# Altium PCB uC_interface_pcb.PcbDoc
Units mil, origin at the board's own origin, x right, y up, seen from the top; angles counter-clockwise.
Board outline 12000 x 9000 mil, 2 copper layers (Top Layer, Bottom Layer); 208 components, 120 nets, 611 pads, 0 vias.
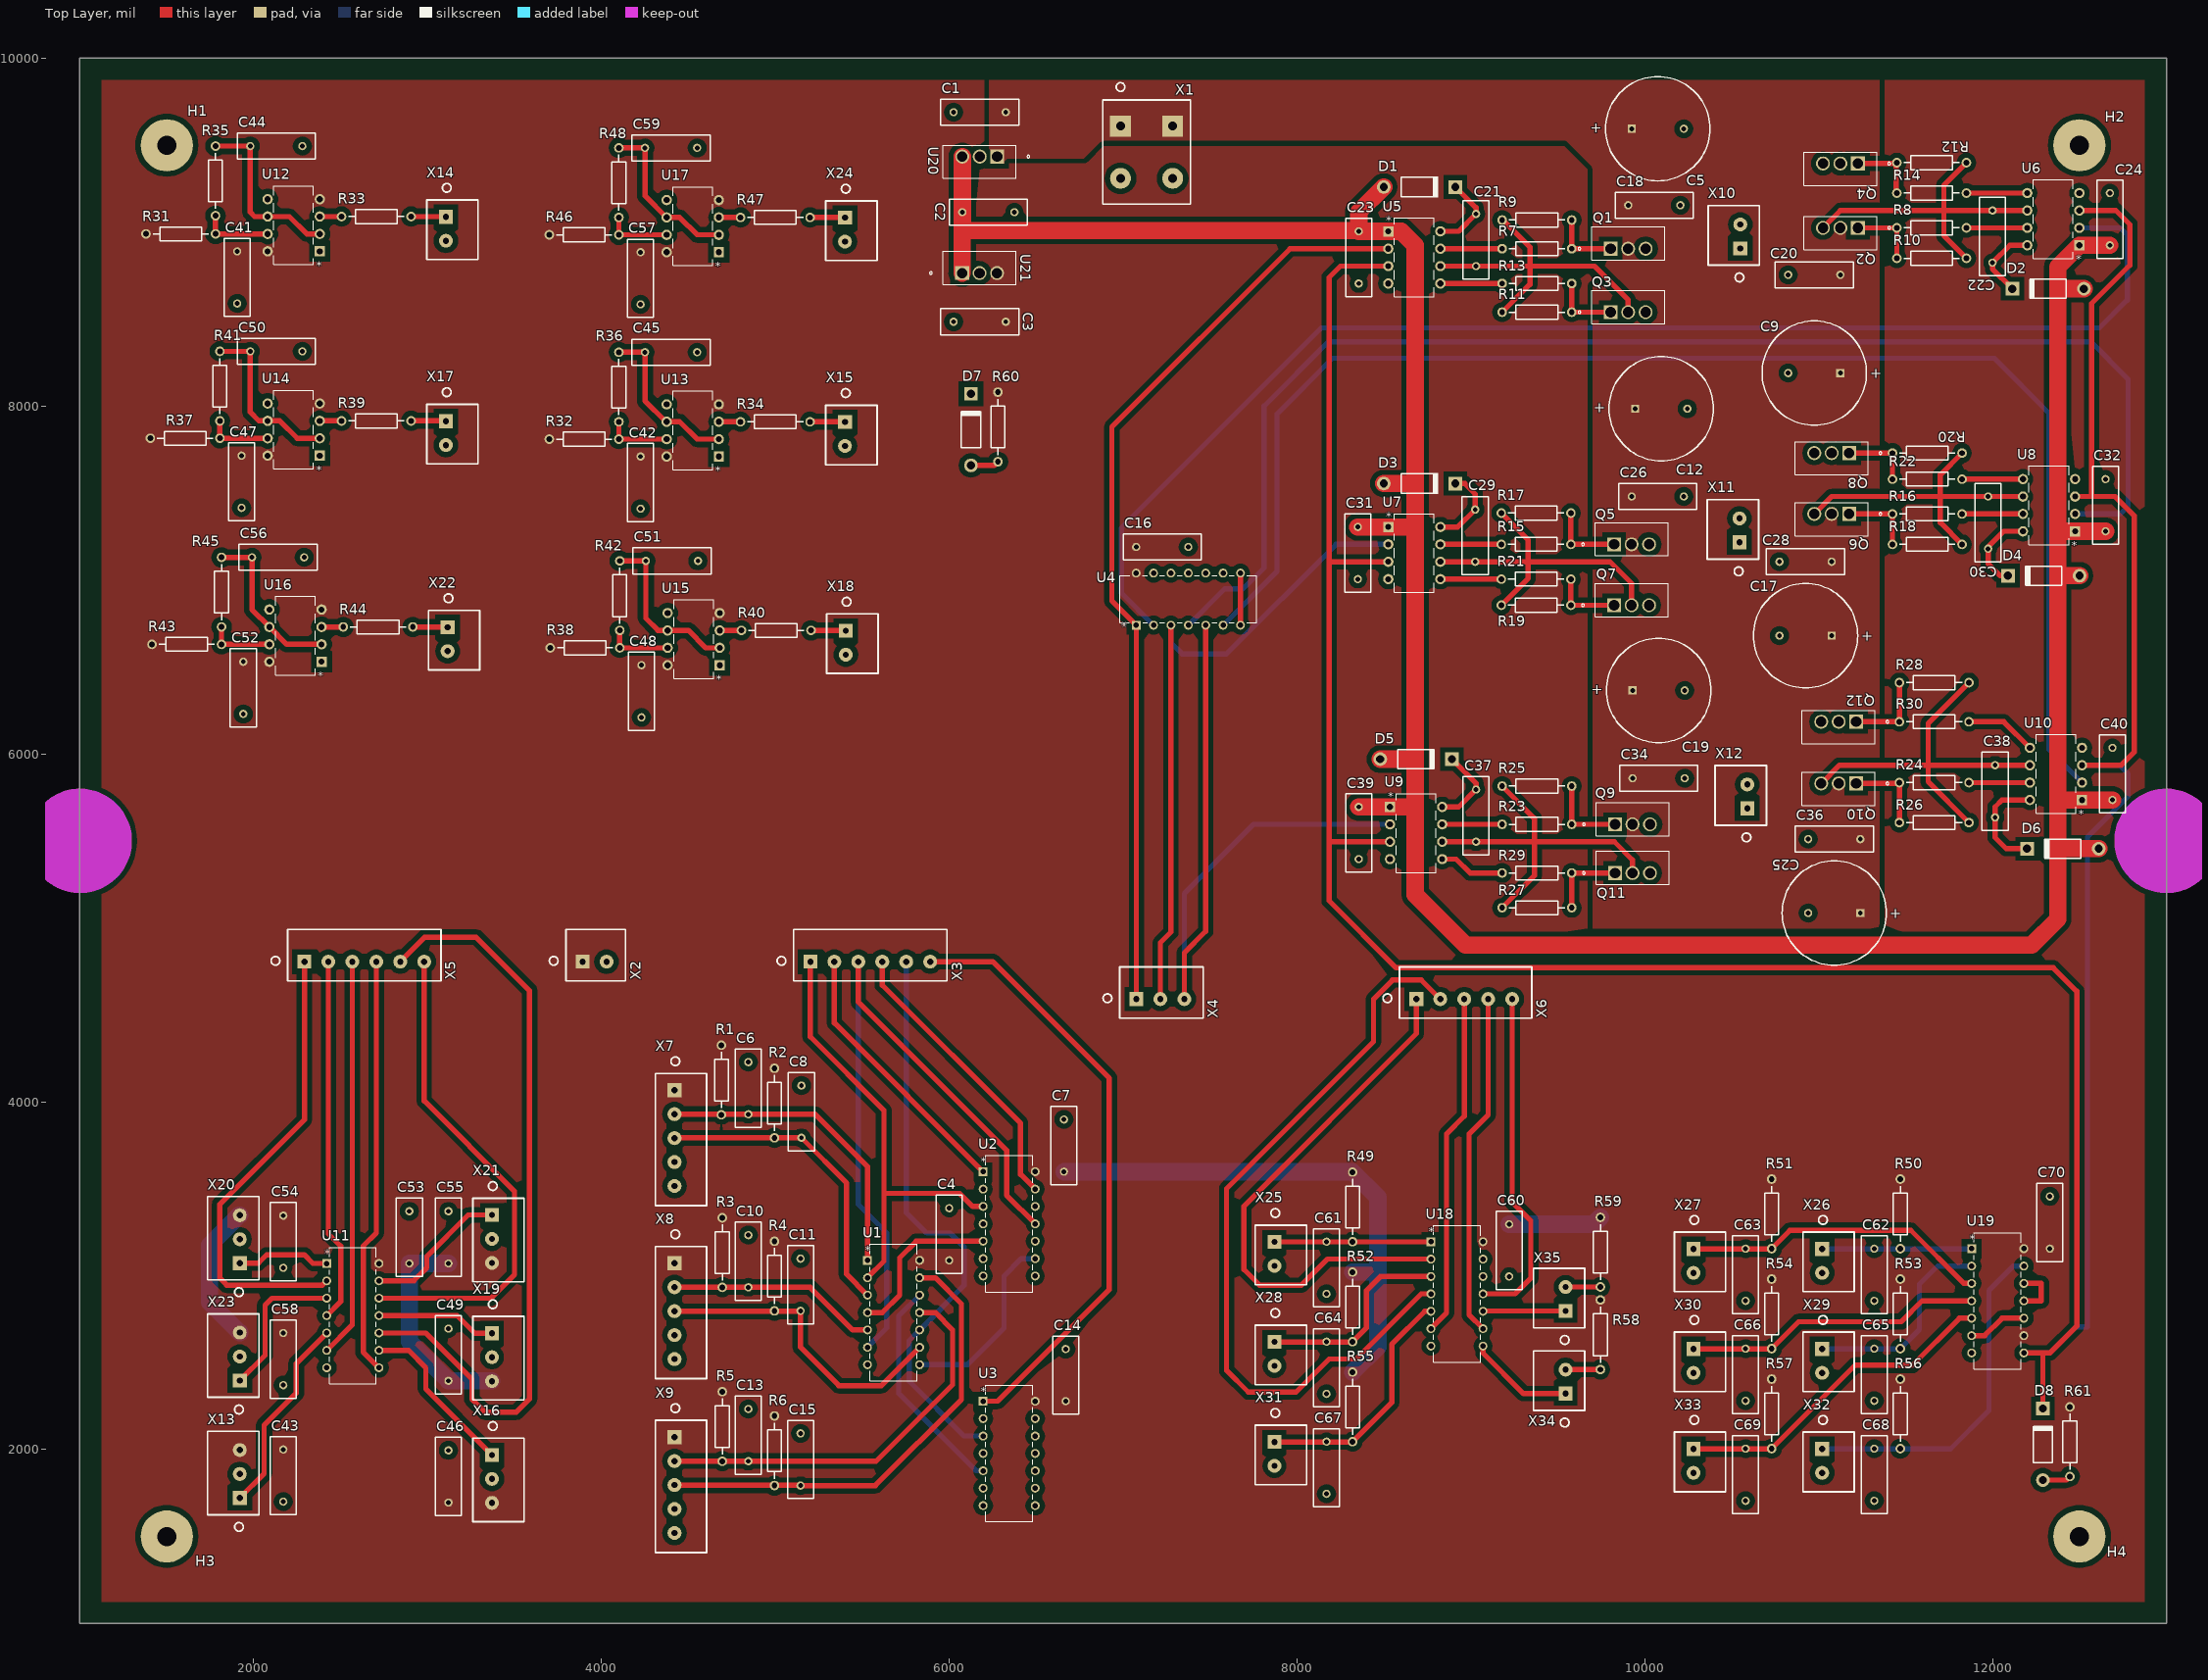
[diagram p0: Top Layer view]
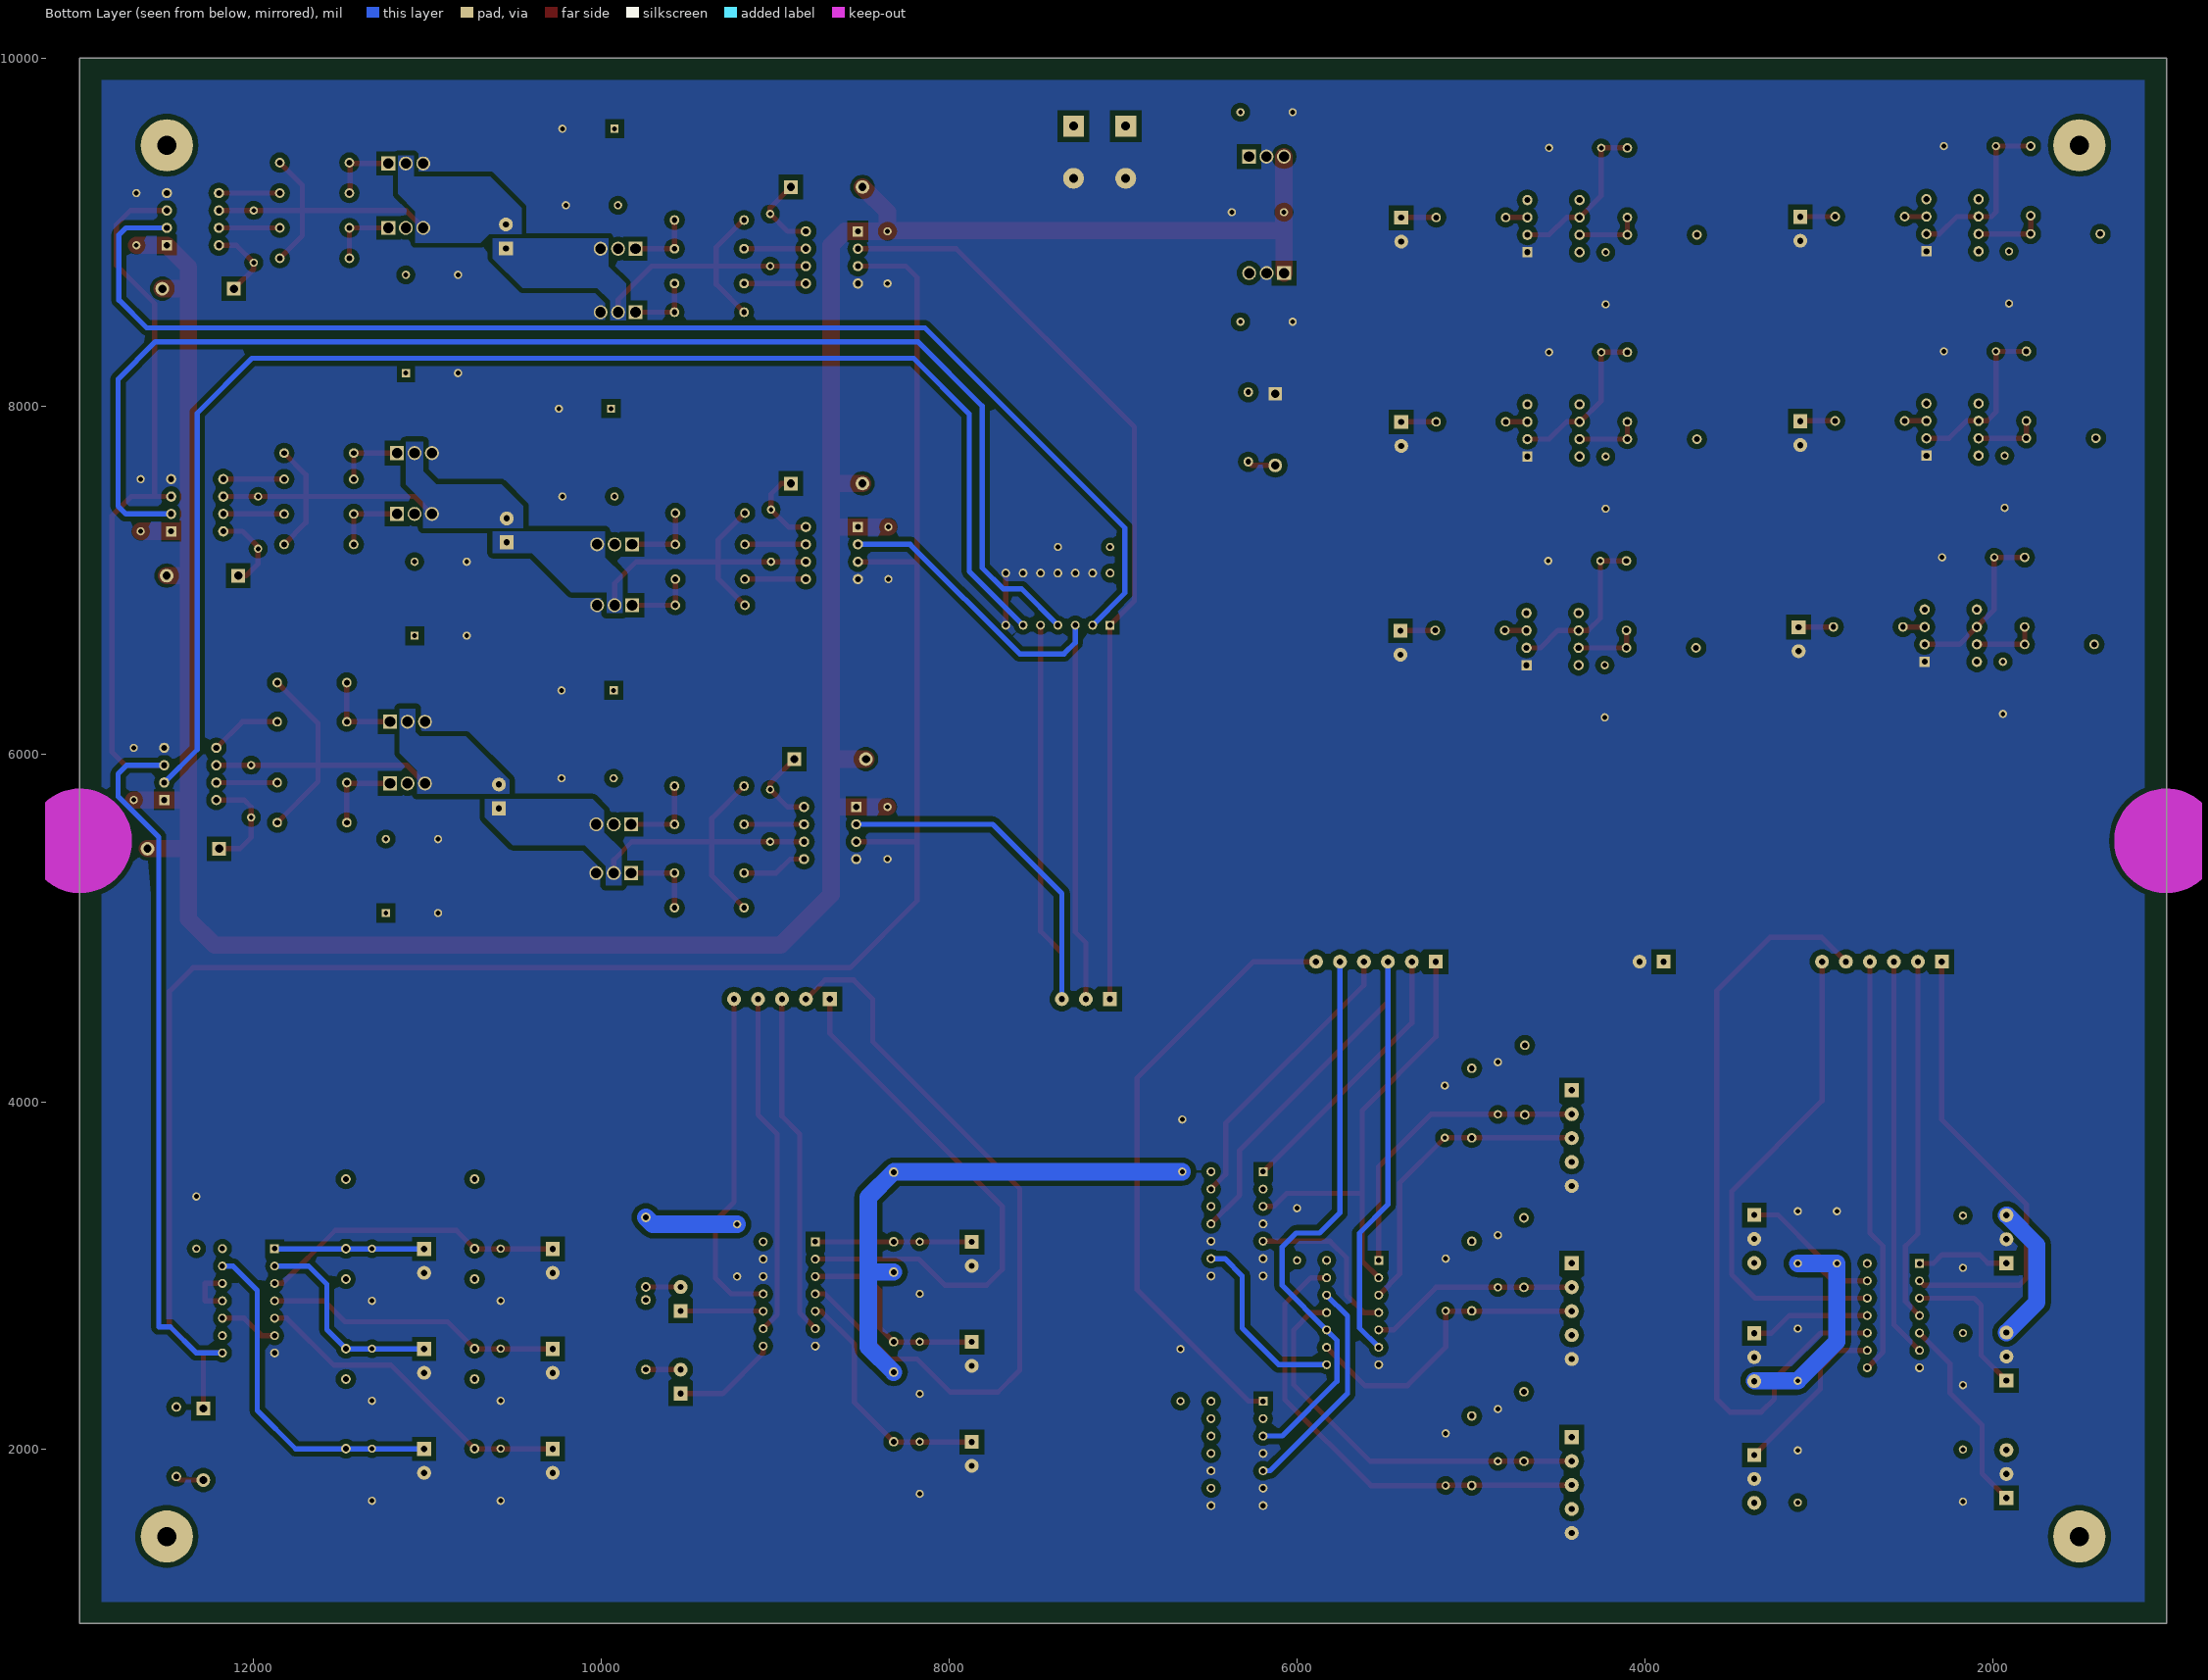
[diagram p1: Bottom Layer view, seen from below]

## Layer stack, top to bottom
Top Layer: signal copper 1.4
Dielectric: dielectric 12.6, FR-4, Dk 4.8
Bottom Layer: signal copper 1.4

## Board outline
1000,1000 13000,1000 13000,10000 1000,10000

## Design rules (kind name [scope] priority, off if disabled: settings)
Clearance Clearance_3 [InNamedPolygon('Bot-GND')] p1: gap=30
Clearance Clearance_2 [InNamedPolygon('Top-V5V')] p2: gap=30
Clearance Clearance_1 [InNamedPolygon('Top-V24V')] p3: gap=30
Clearance [All] p4: gap=10
Height [All] p1: minheight=0 maxheight=2000 prefheight=500
HoleSize [All] p1: absolutevalues=TRUE maxlimit=150 minlimit=1 maxpercent=80.000 minpercent=20.000
PolygonConnect [All] p1: connectstyle=Direct reliefconductorwidth=10 reliefentries=4 polygonreliefangle="90 Angle" airgapwidth=10
RoutingVias [All] p1: holewidth=28 width=50 viastyle="Through Hole" minholewidth=28 minwidth=50 maxholewidth=28 maxwidth=50
SilkToSilkClearance [All] p1 off: silktosilkclearance=10
SilkscreenOverComponentPads [All] p1 off: minsilkscreentomaskgap=10
SolderMaskExpansion [All] p1: expansion=4
Width [All] p1: maxlimit=100 minlimit=30 preferedwidth=30
24 further rules are at their usual default settings.

## Classes and differential pairs
component class 1_Top_Sheet: C1 C2 C3 D7 H1 H2 H3 H4 R60 U20 U21 X1 X2 X3 X4 X5 X6
component class S2: C4 C6 C7 C8 C10 C11 C13 C14 C15 R1 R2 R3 R4 R5 R6 U1 U2 U3 X7 X8 X9
component class S3a: C5 C9 C12 C16 C17 C18 C20 C21 C22 C23 C24 C26 C28 C29 C30 C31 C32 D1 D2 D3 D4 Q1 Q2 Q3 Q4 Q5 Q6 Q7 Q8 R7 R8 R9 R10 R11 R12 R13 R14 R15 R16 R17 R18 R19 R20 R21 R22 U4 U5 U6 U7 U8 X10 X11
component class S3b: C19 C25 C34 C36 C37 C38 C39 C40 D5 D6 Q9 Q10 Q11 Q12 R23 R24 R25 R26 R27 R28 R29 R30 U9 U10 X12
component class S4: C41 C42 C43 C44 C45 C46 C47 C48 C49 C50 C51 C52 C53 C54 C55 C56 C57 C58 C59 R31 R32 R33 R34 R35 R36 R37 R38 R39 R40 R41 R42 R43 R44 R45 R46 R47 R48 U11 U12 U13 U14 U15 U16 U17 X13 X14 X15 X16 X17 X18 X19 X20 X21 X22 X23 X24
component class S5: C60 C61 C62 C63 C64 C65 C66 C67 C68 C69 C70 D8 R49 R50 R51 R52 R53 R54 R55 R56 R57 R58 R59 R61 U18 U19 X25 X26 X27 X28 X29 X30 X31 X32 X33 X34 X35

## Components (designator, comment, footprint, x,y, rotation, side; value= is the part's Value field where it differs from the comment)
C1 "Cap" RAD-0.3 6175,9690 r0 top
C2 "Cap" RAD-0.3 6225,9115 r180 top
C3 "Cap" RAD-0.3 6175,8485 r0 top
C4 "Cap" RAD-0.3 5999.76,3237.64 r270 top
C5 "Cap Pol1" RB7.6-15 10075,9595 r180 top
C6 "Cap" RAD-0.3 4844.76,4077.64 r270 top
C7 "Cap" RAD-0.3 6659.76,3747.64 r270 top
C8 "Cap" RAD-0.3 5149.76,3942.64 r270 top
C9 "Cap Pol1" RB7.6-15 10975,8190 r0 top
C10 "Cap" RAD-0.3 4844.76,3082.64 r270 top
C11 "Cap" RAD-0.3 5144.76,2947.64 r270 top
C12 "Cap Pol1" RB7.6-15 10095,7985 r180 top
C13 "Cap" RAD-0.3 4844.76,2082.64 r270 top
C14 "Cap" RAD-0.3 6669.76,2427.64 r270 top
C15 "Cap" RAD-0.3 5144.76,1942.64 r270 top
C16 "Cap" RAD-0.3 7225,7190 r180 top
C17 "Cap Pol1" RB7.6-15 10925,6680 r0 top
C18 "Cap" RAD-0.3 10055,9155 r180 top
C19 "Cap Pol1" RB7.6-15 10080,6365 r180 top
C20 "Cap" RAD-0.3 10975,8755 r0 top
C21 "Cap" RAD-0.3 9030,8955 r90 top
C22 "Cap" RAD-0.3 12000,8975 r270 top
C23 "Cap" RAD-0.3 8355,8855 r90 top
C24 "Cap" RAD-0.3 12675,9075 r270 top
C25 "Cap Pol1" RB7.6-15 11090,5085 r0 top
C26 "Cap" RAD-0.3 10075,7480 r180 top
C28 "Cap" RAD-0.3 10925,7105 r0 top
C29 "Cap" RAD-0.3 9025,7255 r90 top
C30 "Cap" RAD-0.3 11975,7330 r270 top
C31 "Cap" RAD-0.3 8350,7155 r90 top
C32 "Cap" RAD-0.3 12650,7430 r270 top
C34 "Cap" RAD-0.3 10080,5860 r180 top
C36 "Cap" RAD-0.3 11090,5510 r0 top
C37 "Cap" RAD-0.3 9030,5645 r90 top
C38 "Cap" RAD-0.3 12015,5785 r270 top
C39 "Cap" RAD-0.3 8355,5545 r90 top
C40 "Cap" RAD-0.3 12690,5885 r270 top
C41 "Cap" RAD-0.3 1905,8740 r90 top
C42 "Cap" RAD-0.3 4225,7560 r90 top
C43 "Cap" RAD-0.3 2170,1850 r90 top
C44 "Cap" RAD-0.3 2130,9495 r180 top
C45 "Cap" RAD-0.3 4400,8310 r180 top
C46 "Cap" RAD-0.3 3120,1845 r270 top
C47 "Cap" RAD-0.3 1930,7565 r90 top
C48 "Cap" RAD-0.3 4230,6360 r90 top
C49 "Cap" RAD-0.3 3120,2545 r270 top
C50 "Cap" RAD-0.3 2130,8315 r180 top
C51 "Cap" RAD-0.3 4405,7110 r180 top
C52 "Cap" RAD-0.3 1940,6380 r90 top
C53 "Cap" RAD-0.3 2895,3220 r270 top
C54 "Cap" RAD-0.3 2170,3195 r90 top
C55 "Cap" RAD-0.3 3120,3220 r270 top
C56 "Cap" RAD-0.3 2140,7130 r180 top
C57 "Cap" RAD-0.3 4225,8735 r90 top
C58 "Cap" RAD-0.3 2170,2520 r90 top
C59 "Cap" RAD-0.3 4400,9485 r180 top
C60 "Cap" RAD-0.3 9220,3145 r90 top
C61 "Cap" RAD-0.3 8170,3045 r90 top
C62 "Cap" RAD-0.3 11320,3005 r90 top
C63 "Cap" RAD-0.3 10580,3005 r90 top
C64 "Cap" RAD-0.3 8170,2470 r90 top
C65 "Cap" RAD-0.3 11320,2430 r90 top
C66 "Cap" RAD-0.3 10580,2430 r90 top
C67 "Cap" RAD-0.3 8170,1895 r90 top
C68 "Cap" RAD-0.3 11320,1855 r90 top
C69 "Cap" RAD-0.3 10580,1855 r90 top
C70 "Cap" RAD-0.3 12330,3305 r270 top
D1 "Diode 1N4001" DO-41 8705,9260 r0 top
D2 "Diode 1N4001" DO-41 12320,8675 r180 top
D3 "Diode 1N4001" DO-41 8705,7555 r0 top
D4 "Diode 1N4001" DO-41 12295,7025 r180 top
D5 "Diode 1N4001" DO-41 8685,5970 r0 top
D6 "Diode 1N4001" DO-41 12405,5455 r180 top
D7 "Diode 1N4001" DO-41 6125,7865 r90 top
D8 "Diode 1N4001" DO-41 12290,2030 r90 top
H1 "6-32\" Standoff" "6-32\" Standoff"#1 1200,9800 r0 top
H2 "6-32\" Standoff" "6-32\" Standoff"#2 12800,9800 r0 top
H3 "6-32\" Standoff" "6-32\" Standoff"#3 1200,1200 r0 top
H4 "6-32\" Standoff" "6-32\" Standoff"#4 12800,1200 r0 top
Q1 "STP100N6F7" TO-220 10010,8970 r0 top
Q2 "STP100N6F7" TO-220 11020,8960 r180 top
Q3 "STP100N6F7" TO-220 10010,8605 r0 top
Q4 "STP100N6F7" TO-220 11020,9330 r180 top
Q5 "STP100N6F7" TO-220 10030,7270 r0 top
Q6 "STP100N6F7" TO-220 10970,7315 r180 top
Q7 "STP100N6F7" TO-220 10030,6920 r0 top
Q8 "STP100N6F7" TO-220 10970,7665 r180 top
Q9 "STP100N6F7" TO-220 10035,5660 r0 top
Q10 "STP100N6F7" TO-220 11010,5765 r180 top
Q11 "STP100N6F7" TO-220 10035,5380 r0 top
Q12 "STP100N6F7" TO-220 11010,6120 r180 top
R1 "Res2" AXIAL-0.4 4689.76,4125 r90 top
R2 "Res2" AXIAL-0.4 4994.76,3992.64 r90 top
R3 "Res2" AXIAL-0.4 4694.76,3132.64 r90 top
R4 "Res2" AXIAL-0.4 4994.76,2997.64 r90 top
R5 "Res2" AXIAL-0.4 4694.76,2132.64 r90 top
R6 "Res2" AXIAL-0.4 4994.76,1992.64 r90 top
R7 "Res2" AXIAL-0.4 9380,8905 r180 top
R8 "Res2" AXIAL-0.4 11650,9025 r0 top
R9 "Res2" AXIAL-0.4 9380,9070 r180 top
R10 "Res2" AXIAL-0.4 11650,8850 r0 top
R11 "Res2" AXIAL-0.4 9380,8540 r0 top
R12 "Res2" AXIAL-0.4 11650,9400 r180 top
R13 "Res2" AXIAL-0.4 9380,8705 r180 top
R14 "Res2" AXIAL-0.4 11650,9225 r0 top
R15 "Res2" AXIAL-0.4 9375,7205 r180 top
R16 "Res2" AXIAL-0.4 11625,7380 r0 top
R17 "Res2" AXIAL-0.4 9375,7385 r180 top
R18 "Res2" AXIAL-0.4 11625,7205 r0 top
R19 "Res2" AXIAL-0.4 9375,6855 r0 top
R20 "Res2" AXIAL-0.4 11625,7730 r180 top
R21 "Res2" AXIAL-0.4 9375,7005 r180 top
R22 "Res2" AXIAL-0.4 11625,7580 r0 top
R23 "Res2" AXIAL-0.4 9380,5595 r180 top
R24 "Res2" AXIAL-0.4 11665,5835 r0 top
R25 "Res2" AXIAL-0.4 9380,5815 r180 top
R26 "Res2" AXIAL-0.4 11665,5605 r0 top
R27 "Res2" AXIAL-0.4 9380,5115 r0 top
R28 "Res2" AXIAL-0.4 11665,6410 r180 top
R29 "Res2" AXIAL-0.4 9380,5315 r180 top
R30 "Res2" AXIAL-0.4 11665,6185 r0 top
R31 "Res2" AXIAL-0.4 1580,8990 r0 top
R32 "Res2" AXIAL-0.4 3900,7810 r0 top
R33 "Res2" AXIAL-0.4 2705,9090 r180 top
R34 "Res2" AXIAL-0.4 5000,7910 r180 top
R35 "Res2" AXIAL-0.4 1780,9295 r90 top
R36 "Res2" AXIAL-0.4 4100,8110 r90 top
R37 "Res2" AXIAL-0.4 1605,7815 r0 top
R38 "Res2" AXIAL-0.4 3905,6610 r0 top
R39 "Res2" AXIAL-0.4 2705,7915 r180 top
R40 "Res2" AXIAL-0.4 5005,6710 r180 top
R41 "Res2" AXIAL-0.4 1805,8115 r90 top
R42 "Res2" AXIAL-0.4 4105,6910 r90 top
R43 "Res2" AXIAL-0.4 1615,6630 r0 top
R44 "Res2" AXIAL-0.4 2715,6730 r180 top
R45 "Res2" AXIAL-0.4 1815,6930 r90 top
R46 "Res2" AXIAL-0.4 3900,8985 r0 top
R47 "Res2" AXIAL-0.4 5000,9085 r180 top
R48 "Res2" AXIAL-0.4 4100,9285 r90 top
R49 "Res2" AXIAL-0.4 8320,3395 r90 top
R50 "Res2" AXIAL-0.4 11470,3355 r90 top
R51 "Res2" AXIAL-0.4 10730,3355 r90 top
R52 "Res2" AXIAL-0.4 8320,2820 r90 top
R53 "Res2" AXIAL-0.4 11470,2780 r90 top
R54 "Res2" AXIAL-0.4 10730,2780 r90 top
R55 "Res2" AXIAL-0.4 8320,2245 r90 top
R56 "Res2" AXIAL-0.4 11470,2205 r90 top
R57 "Res2" AXIAL-0.4 10730,2205 r90 top
R58 "Res2" AXIAL-0.4 9745,2660 r90 top
R59 "Res2" AXIAL-0.4 9745,3135 r90 top
R60 "Res2" AXIAL-0.4 6280,7880 r90 top
R61 "Res2" AXIAL-0.4 12445,2045 r90 top
U1 "IC HEX SCHMITT-TRIG INV 14-DIP" 14-DIP 5829.76,2487.64 r0 top
U2 "IC D-TYPE POS TRG DUAL 14DIP" 14-DIP 6494.76,2997.64 r0 top
U3 "IC D-TYPE POS TRG DUAL 14DIP" 14-DIP 6494.76,1677.64 r0 top
U4 "IC HEX SCHMITT-TRIG INV 14-DIP" 14-DIP 7675,7040 r90 top
U5 "IC DRIVER HALF BRIDGE 8DIP" 8-DIP 8825,8705 r0 top
U6 "IC DRIVER HALF BRIDGE 8DIP" 8-DIP 12200,9225 r180 top
U7 "IC DRIVER HALF BRIDGE 8DIP" 8-DIP 8825,7005 r0 top
U8 "IC DRIVER HALF BRIDGE 8DIP" 8-DIP 12175,7580 r180 top
U9 "IC DRIVER HALF BRIDGE 8DIP" 8-DIP 8835,5395 r0 top
U10 "IC DRIVER HALF BRIDGE 8DIP" 8-DIP 12215,6035 r180 top
U11 "IC HEX SCHMITT-TRIG INV 14-DIP" 14-DIP 2720,2470 r0 top
U12 "IC OSC SINGLE TIMER 100KHZ 8-DIP" 8-DIP 2080,9190 r180 top
U13 "IC OSC SINGLE TIMER 100KHZ 8-DIP" 8-DIP 4375,8010 r180 top
U14 "IC OSC SINGLE TIMER 100KHZ 8-DIP" 8-DIP 2080,8015 r180 top
U15 "IC OSC SINGLE TIMER 100KHZ 8-DIP" 8-DIP 4380,6810 r180 top
U16 "IC OSC SINGLE TIMER 100KHZ 8-DIP" 8-DIP 2090,6830 r180 top
U17 "IC OSC SINGLE TIMER 100KHZ 8-DIP" 8-DIP 4375,9185 r180 top
U18 "IC HEX SCHMITT-TRIG INV 14-DIP" 14-DIP 9070,2595 r0 top
U19 "IC GATE AND 3CH 3-INP 14DIP" 14-DIP 12180,2555 r0 top
U20 "IC REG LINEAR 15V 1A TO220-3" TO-220 6070,9370 r180 top
U21 "IC REG LINEAR 5V 1.5A TO220-3" TO-220 6280,8830 r0 top
X1 "TERM BLOCK HDR 2POS VERT 7.62MM" "PCV 4-2" 6985,9610 r270 top
X2 "TERM BLOCK HDR 2POS VERT 3.5MM" "WR-TBL-3211 2" 3795,4695 r0 top
X3 "TERM BLOCK HDR 6POS VERT 3.5MM" "WR-TBL-3211 6" 5105,4695 r0 top
X4 "TERM BLOCK HDR 3POS VERT 3.5MM" "WR-TBL-3211 3" 6980,4480 r0 top
X5 "TERM BLOCK HDR 6POS VERT 3.5MM" "WR-TBL-3211 6" 2195,4695 r0 top
X6 "TERM BLOCK HDR 5POS VERT 3.5MM" "WR-TBL-3211 5" 8590,4480 r0 top
X7 "TERM BLOCK HDR 5POS VERT 3.5MM" "WR-TBL-3211 5" 4309.76,4162.64 r270 top
X8 "TERM BLOCK HDR 5POS VERT 3.5MM" "WR-TBL-3211 5" 4309.76,3167.64 r270 top
X9 "TERM BLOCK HDR 5POS VERT 3.5MM" "WR-TBL-3211 5" 4309.76,2167.64 r270 top
X10 "TERM BLOCK HDR 2POS VERT 3.5MM" "WR-TBL-3211 2" 10660,8810 r90 top
X11 "TERM BLOCK HDR 2POS VERT 3.5MM" "WR-TBL-3211 2" 10655,7120 r90 top
X12 "TERM BLOCK HDR 2POS VERT 3.5MM" "WR-TBL-3211 2" 10700,5590 r90 top
X13 "TERM BLOCK HDR 3POS VERT 3.5MM" "WR-TBL-3211 3" 2030,1625 r90 top
X14 "TERM BLOCK HDR 2POS VERT 3.5MM" "WR-TBL-3211 2" 2995,9185 r270 top
X15 "TERM BLOCK HDR 2POS VERT 3.5MM" "WR-TBL-3211 2" 5290,8005 r270 top
X16 "TERM BLOCK HDR 3POS VERT 3.5MM" "WR-TBL-3211 3" 3260,2065 r270 top
X17 "TERM BLOCK HDR 2POS VERT 3.5MM" "WR-TBL-3211 2" 2995,8010 r270 top
X18 "TERM BLOCK HDR 2POS VERT 3.5MM" "WR-TBL-3211 2" 5295,6805 r270 top
X19 "TERM BLOCK HDR 3POS VERT 3.5MM" "WR-TBL-3211 3" 3260,2765 r270 top
X20 "TERM BLOCK HDR 3POS VERT 3.5MM" "WR-TBL-3211 3" 2030,2975 r90 top
X21 "TERM BLOCK HDR 3POS VERT 3.5MM" "WR-TBL-3211 3" 3260,3445 r270 top
X22 "TERM BLOCK HDR 2POS VERT 3.5MM" "WR-TBL-3211 2" 3005,6825 r270 top
X23 "TERM BLOCK HDR 3POS VERT 3.5MM" "WR-TBL-3211 3" 2030,2300 r90 top
X24 "TERM BLOCK HDR 2POS VERT 3.5MM" "WR-TBL-3211 2" 5290,9180 r270 top
X25 "TERM BLOCK HDR 2POS VERT 3.5MM" "WR-TBL-3211 2" 7760,3290 r270 top
X26 "TERM BLOCK HDR 2POS VERT 3.5MM" "WR-TBL-3211 2" 10910,3250 r270 top
X27 "TERM BLOCK HDR 2POS VERT 3.5MM" "WR-TBL-3211 2" 10170,3250 r270 top
X28 "TERM BLOCK HDR 2POS VERT 3.5MM" "WR-TBL-3211 2" 7760,2715 r270 top
X29 "TERM BLOCK HDR 2POS VERT 3.5MM" "WR-TBL-3211 2" 10910,2675 r270 top
X30 "TERM BLOCK HDR 2POS VERT 3.5MM" "WR-TBL-3211 2" 10170,2675 r270 top
X31 "TERM BLOCK HDR 2POS VERT 3.5MM" "WR-TBL-3211 2" 7760,2140 r270 top
X32 "TERM BLOCK HDR 2POS VERT 3.5MM" "WR-TBL-3211 2" 10910,2100 r270 top
X33 "TERM BLOCK HDR 2POS VERT 3.5MM" "WR-TBL-3211 2" 10170,2100 r270 top
X34 "TERM BLOCK HDR 2POS VERT 3.5MM" "WR-TBL-3211 2" 9655,2225 r90 top
X35 "TERM BLOCK HDR 2POS VERT 3.5MM" "WR-TBL-3211 2" 9655,2700 r90 top

## Footprints (in the part's own frame and the unit in brackets; to place one, negate y for a bottom-side part, rotate by r counter-clockwise, add the part's x,y. Pads: shape width x height; smd on the part's side, far side on the other; paste and mask are expansions set on the pad)
"6-32\" Standoff"#1 [mil] "Hole for a 6-32\" Standoff"
  round 300 hole 109.38: 0(300,-300)
"6-32\" Standoff"#2 [mil] "Hole for a 6-32\" Standoff"
  round 300 hole 109.38: 0(-300,-300)
"6-32\" Standoff"#3 [mil] "Hole for a 6-32\" Standoff"
  round 300 hole 109.38: 0(300,300)
"6-32\" Standoff"#4 [mil] "Hole for a 6-32\" Standoff"
  round 300 hole 109.38: 0(-300,300)
8-DIP [mil]
  rect 59x59 / inner round 60 / far side rect 59x59 hole 35 paste+0 mask+0: 1(-300,300)
  round 59 / inner round 60 / far side round 59 hole 35 paste+0 mask+0: 2(-300,200) 3(-300,100) 4(-300,0) 5(0,0) 6(0,100) 7(0,200) 8(0,300)
  silkscreen extent -264,-76 -36,376, body extent 0,0 10,10, height 10
14-DIP [mil]
  rect 51x51 / inner round 60 / far side rect 51x51 hole 31 paste+0 mask+0: 1(-300,600)
  round 51 / inner round 60 / far side round 51 hole 31 paste+0 mask+0: 2(-300,500) 3(-300,400) 4(-300,300) 5(-300,200) 6(-300,100) 7(-300,0) 8(0,0) 9(0,100) 10(0,200) 11(0,300) 12(0,400) 13(0,500) 14(0,600)
  silkscreen extent -285,-92 -15,692, body extent 0,0 10,10, height 10
AXIAL-0.4 [mm] "Axial Device, Thru-Hole; 2 Leads; 0.4 in Pin Spacing"
  round 1.4 hole 0.85: 1(-5.08,0) 2(5.08,0)
  silkscreen extent -4.06,-1.02 4.06,1.02
DO-41 [mm] "Diode, Axial; Body 5.2 x 2.7 mm (LxDia. max), Lead Dia. 0.86 mm (max)"
  round 2 hole 1.2: 1(-5.23,0)
  rect 2x2 hole 1.2: 2(5.23,0)
  silkscreen extent -2.65,-1.4 2.75,1.4
"PCV 4-2" [mil] "TERM BLOCK HDR 2POS VERT 7.62MM"
  rect 120x120 hole 51.18: 1(0,300) 1(0,0)
  round 120 hole 51.18: 2(300,300) 2(300,0)
  silkscreen extent -250,-102 449,402
RAD-0.3 [mm] "Radial Cap, Thru-Hole; 2 Leads; 0.3 in Pin Spacing"
  round 1.2 hole 0.7: 1(-3.81,0) 2(3.81,0)
  silkscreen extent -5.71,-1.91 5.71,1.91
RB7.6-15 [mm] "Polarized Capacitor (Radial); 2 Leads"
  rect 1.2x1.2 hole 0.7: 1(3.81,0)
  round 1.2 hole 0.7: 2(-3.81,0)
  silkscreen extent -7.62,-7.62 7.62,7.62
TO-220 [mil]
  rect 80x80 / inner round 60 / far side rect 80x80 hole 60: 1(-205.79,-65)
  round 80 / inner round 60 / far side round 80 hole 60: 2(-105.39,-65) 3(-5,-65)
  silkscreen extent -393,-130 105,60, body extent -5,-5 5,5, height 10
"WR-TBL-3211 2" [mm] "TERM BLOCK HDR 2POS VERT 3.5MM"
  rect 2.032x2.032 hole 0.9: 1(2.45,2.8)
  round 2.032 hole 0.9: 2(5.95,2.8)
  silkscreen extent -2.41,0 8.7,7.5
"WR-TBL-3211 3" [mm] "TERM BLOCK HDR 3POS VERT 3.5MM"
  rect 2.032x2.032 hole 0.9: 1(2.45,2.8)
  round 2.032 hole 0.9: 2(5.95,2.8) 3(9.45,2.8)
  silkscreen extent -2.41,0 12.2,7.5
"WR-TBL-3211 5" [mm] "TERM BLOCK HDR 5POS VERT 3.5MM"
  rect 2.032x2.032 hole 0.9: 1(2.45,2.8)
  round 2.032 hole 0.9: 2(5.95,2.8) 3(9.45,2.8) 4(12.95,2.8) 5(16.45,2.8)
  silkscreen extent -2.41,0 19.3,7.5
"WR-TBL-3211 6" [mm] "TERM BLOCK HDR 6POS VERT 3.5MM"
  rect 2.032x2.032 hole 0.9: 1(2.45,2.8)
  round 2.032 hole 0.9: 2(5.95,2.8) 3(9.45,2.8) 4(12.95,2.8) 5(16.45,2.8) 6(19.95,2.8)
  silkscreen extent -2.41,0 22.4,7.5

## Part data
C1 C2 C3 C4 C6 C7 C8 C10 C11 C13 C14 C15 C16 C18 C20 C21 C22 C23 C24 C26 C28 C29 C30 C31 C32 C34 C36 C37 C38 C39 C40 C41 C42 C43 C44 C45 C46 C47 C48 C49 C50 C51 C52 C53 C54 C55 C56 C57 C58 C59 C60 C61 C62 C63 C64 C65 C66 C67 C68 C69 C70: "Capacitor"
C5 C9 C12 C17 C19 C25: "Polarized Capacitor (Radial)"
D1 D2 D3 D4 D5 D6 D7 D8: "1 Amp General Purpose Rectifier"
H1 H2 H3 H4: "Mounting hole for 6-32\" Standoff"
R1 R2 R3 R4 R5 R6 R7 R8 R9 R10 R11 R12 R13 R14 R15 R16 R17 R18 R19 R20 R21 R22 R23 R24 R25 R26 R27 R28 R29 R30 R31 R32 R33 R34 R35 R36 R37 R38 R39 R40 R41 R42 R43 R44 R45 R46 R47 R48 R49 R50 R51 R52 R53 R54 R55 R56 R57 R58 R59 R60 R61: "Resistor"

## Nets (pads, with @x,y where several pads share a name; then routed paths per layer and width w, separated by ;. In a path a pad name is that pad's centre, name@x,y a point inside that pad or via, vN(x,y) a via of type N, cw(c..) or ccw(c..) an arc to the next point about the centre after c; other vN are vias at no path point)
ENC_1_A: U1.2 U2.3 X3.1 | length 2631
  Top Layer w30: X3.1 5201.46,4373.54 5624.76,3950.24 5624.76,3082.64 U1.2 ; 5627.13,3472.64 6059.76,3472.64 6134.76,3397.64 U2.3
ENC_1_B: U2.1 X3.2 | length 1562
  Top Layer w30: X3.2 5339.25,4453.15 U2.1
ENC_2_A: U1.6 U2.11 X3.3 | length 4259.9
  Top Layer w30: X3.3 5477.05,4572.95 6330,3720 6330,3462.4 U2.11
  Bottom Layer w30: X3.3 5477.05,3407.95 5640,3245 5640,2697.87 U1.6
ENC_2_B: U2.13 X3.4 | length 1672.1
  Top Layer w30: X3.4 5614.84,4670.16 6410,3875 6410,3582.4 U2.13
ENC_3_A: U1.10 U3.3 X3.5 | length 3315.4
  Bottom Layer w30: X3.5 5752.64,3362.36 5870,3245 6005,3245 6085,3165 6085,2942.87 U1.10 5769.76,2627.64 5769.76,2392.64 6084.76,2077.64 U3.3
ENC_3_B: U3.1 X3.6 | length 3513.5
  Top Layer w30: X3.6 6249.76,4805.24 6920,4135 6920,2920 6277.64,2277.64 U3.1
GND: C1.1 C2.1 C3.1 C4.1 C5.2 C6.1 C7.1 C8.1 C9.2 C10.1 C11.1 C12.2 C13.1 C14.1 C15.1 C16.1 C17.2 C18.1 C19.2 C20.1 C23.1 C24.1 C25.2 C26.1 C28.1 C31.1 C32.1 C34.1 C36.1 C39.1 C40.1 C41.1 C42.1 C43.1 C44.1 C45.1 C46.1 C47.1 C48.1 C49.1 C50.1 C51.1 C52.1 C53.1 C54.1 C55.1 C56.1 C57.1 C58.1 C59.1 C60.1 C61.1 C62.1 C63.1 C64.1 C65.1 C66.1 C67.1 C68.1 C69.1 C70.1 D7.2 Q3.3 Q4.3 Q7.3 Q8.3 Q11.3 Q12.3 U1.7 U2.4 U2.6 U2.7 U2.8 U2.10 U3.4 U3.6 U3.7 U3.8 U3.10 U4.7 U4.8 U4.9 U4.10 U4.11 U4.12 U4.13 U5.4 U6.4 U7.4 U8.4 U9.4 U10.4 U11.7 U12.1 U13.1 U14.1 U15.1 U16.1 U17.1 U18.7 U18.12 U18.13 U19.7 U20.2 U21.2 X1.2 X2.2 X7.5 X8.5 X9.5 X13.2 X14.2 X15.2 X16.2 X17.2 X18.2 X19.2 X20.2 X21.2 X22.2 X23.2 X24.2 X25.2 X26.2 X27.2 X28.2 X29.2 X30.2 X31.2 X32.2 X33.2 | length 300
  Top Layer w30: U4.7 U4.8
GOAL_LED_1: U18.9 X6.4 | length 1973.9
  Top Layer w30: U18.9 8990,2775 8990,3815 9099.84,3924.84 X6.4
GOAL_LED_2: U18.11 X6.5 | length 1962
  Top Layer w30: U18.11 9255,2895 9345,2985 9345,3315 9237.64,3422.36 X6.5
IR_SNS_1: U11.2 X5.1 | length 2663.7
  Top Layer w30: X5.1 2291.46,3896.46 1805,3410 1805,2985 1845,2945 2395,2945 U11.2
IR_SNS_2: U11.4 X5.2 | length 2097.7
  Top Layer w30: U11.4 2500,2850 2500,3170 2429.25,3240.75 X5.2
IR_SNS_3: U11.6 X5.3 | length 2296.1
  Top Layer w30: U11.6 2567.05,2717.05 X5.3
IR_SNS_4: U11.8 X5.4 | length 2403.5
  Top Layer w30: X5.4 2704.84,3244.84 2630,3170 2630,2560 U11.8
IR_SNS_5: U11.10 X5.5 | length 4428.5
  Top Layer w30: U11.10 2990,2670 3255,2405 3255,2290 3330,2215 3510,2215 3585,2290 3585,4640 3280,4945 2982.4,4945 X5.5
IR_SNS_6: U11.12 X5.6 | length 2851.4
  Top Layer w30: U11.12 3365,2870 3500,3005 3500,3485 2980.43,4004.57 X5.6
MOTOR_1_NEG: C22.1 Q2.3 Q4.2 R10.2 R12.1 U6.6 X10.2 | length 1874.1
  Top Layer w30: Q2.3 11125,9125 11720,9125 ; R10.2 11720,8980 11720,9125 ; R12.1 11720,9270 11720,9125 ; U6.6 C22.1 11720,9125
MOTOR_1_POS: C21.1 Q1.3 Q3.2 R9.2 R11.1 U5.6 X10.1 | length 1896.1
  Top Layer w30: U5.6 C21.1 9340,8805 ; R11.1 9340,8700 9340,8805 ; R9.2 9185,9070 9340,8915 9340,8805 ; Q3.2 9904.61,8610.39 9710,8805 9340,8805
MOTOR_1_PWM: U4.1 U5.2 X4.1 | length 5360.9
  Top Layer w30: U4.1 6935,6880 6935,7880 7960,8905 U5.2 ; X4.1 U4.1@7076.46,6738.54
MOTOR_2_NEG: C30.1 Q6.3 Q8.2 R18.2 R20.1 U8.6 X11.2 | length 1870
  Top Layer w30: Q6.3 11075,7480 11700,7480 ; R18.2 11700,7330 11700,7480 ; R20.1 11700,7605 11700,7480 ; U8.6 C30.1 11700,7480
MOTOR_2_POS: C29.1 Q5.3 Q7.2 R17.2 R19.1 U7.6 X11.1 | length 1935
  Top Layer w30: U7.6 C29.1 9330,7105 ; R19.1 9330,7010 9330,7105 ; R17.2 9330,7230 9330,7105 ; Q7.2 9924.61,6980.39 9800,7105 9330,7105
MOTOR_2_PWM: U4.3 U7.2 X4.2 | length 3812.8
  Top Layer w30: X4.2 7214.25,4914.25 7275,4975 U4.3
  Bottom Layer w30: U4.3 7275,6640 7340,6575 7595,6575 8225,7205 U7.2
MOTOR_3_NEG: C38.1 Q10.3 Q12.2 R26.2 R28.1 U10.6 X12.2 | length 2243.2
  Top Layer w30: Q10.3 11120,5935 11630,5935 ; R26.2 11630,5840 11630,5935 ; R28.1 11630,6175 11630,5935 ; U10.6 C38.1 11630,5935
MOTOR_3_POS: C37.1 Q9.3 Q11.2 R25.2 R27.1 U9.6 X12.1 | length 2066.6
  Top Layer w30: U9.6 C37.1 9365,5495 ; R27.1 9365,5300 9365,5495 ; R25.2 9365,5630 9365,5495 ; Q11.2 9929.61,5390.39 9825,5495 9365,5495
MOTOR_3_PWM: U4.5 U9.2 X4.3 | length 4155.3
  Top Layer w30: X4.3 7352.05,4857.05 7475,4980 U4.5
  Bottom Layer w30: X4.3 7352.05,5197.05 7750,5595 U9.2
NetC6_2: C6.2 R1.1 U1.1 X7.2 | length 1773.3
  Top Layer w30: X7.2@4420.75,3927.64 4694.76,3927.64 C6.2 5229.76,3927.64 5529.76,3627.64 U1.1
NetC8_2: C8.2 R2.1 U1.3 X7.3 | length 1790.1
  Top Layer w30: X7.3@4422.05,3792.64 R2.1 C8.2 5409.76,3532.64 5409.76,3007.64 U1.3
NetC10_2: C10.2 R3.1 U1.5 X8.2 | length 1210.5
  Top Layer w30: X8.2 5199.02,2933.39 ; 5199.76,2932.64 5444.76,2687.64 U1.5
NetC11_2: C11.2 R4.1 U1.9 X8.3 | length 1800
  Top Layer w30: X8.3 C11.2@5142.72,2795.59 ; C11.2 5144.76,2587.64 5364.76,2367.64 5609.76,2367.64 U1.9
NetC13_2: C13.2 R5.1 U1.11 X9.2 | length 2327.7
  Top Layer w30: X9.2@4420.75,1932.64 R5.1 C13.2 5579.76,1932.64 6019.76,2372.64 6019.76,2687.64 5919.76,2787.64 U1.11
NetC15_2: C15.2 R6.1 U1.13 X9.3 | length 2704
  Top Layer w30: X9.3 C15.2@5141.81,1795.59 ; C15.2 5574.76,1792.64 6069.76,2287.64 6069.76,2837.64 5919.76,2987.64 U1.13
NetC21_2: C21.2 D1.2 U5.8 | length 450.8
  Top Layer w30: U5.8 8930,9005 C21.2 9030,9140.91 D1.2
NetC22_2: C22.2 D2.2 U6.8 | length 438.7
  Top Layer w30: D2.2 12000,8789.09 C22.2 12100,8925 U6.8
NetC29_2: C29.2 D3.2 U7.8 | length 470.4
  Top Layer w30: U7.8 8925,7305 C29.2 9025,7495 8965,7555 D3.2
NetC30_2: C30.2 D4.2 U8.8 | length 475.4
  Top Layer w30: D4.2 12045,7025 11975,7095 C30.2 11975,7190 12065,7280 U8.8
NetC37_2: C37.2 D5.2 U9.8 | length 469
  Top Layer w30: U9.8 8930,5695 C37.2 9030,5830.91 D5.2
NetC38_2: C38.2 D6.2 U10.8 | length 602.6
  Top Layer w30: D6.2 12080,5455 12015,5520 C38.2 12015,5695 12055,5735 U10.8
NetC44_2: C44.2 R35.2 U12.2 U12.6 | length 1031.8
  Top Layer w30: R35.2 C44.2 1980,9115 2005,9090 U12.6 2205,9090 2305,8990 U12.2
NetC45_2: C45.2 R36.2 U13.2 U13.6 | length 941.1
  Top Layer w30: R36.2 C45.2 4250,8030 U13.6@4370,7910 ; U13.6 4450,7910 4550,7810 U13.2
NetC50_2: C50.2 R41.2 U14.2 U14.6 | length 987.1
  Top Layer w30: R41.2 C50.2 1980,7965 2030,7915 U14.6 2150,7915 2250,7815 U14.2
NetC51_2: C51.2 R42.2 U15.2 U15.6 | length 975.4
  Top Layer w30: R42.2 C51.2 4255,6780 4325,6710 U15.6 4500,6710 4600,6610 U15.2
NetC56_2: C56.2 R45.2 U16.2 U16.6 | length 957.8
  Top Layer w30: R45.2 C56.2 1990,6830 U16.6 2190,6630 U16.2
NetC59_2: C59.2 R48.2 U17.2 U17.6 | length 943.2
  Top Layer w30: R48.2 C59.2 4250,9210 U17.6 4450,9085 4550,8985 U17.2
NetC61_2: C61.2 R49.1 U18.1 X25.1 | length 898.3
  Top Layer w30: X25.1 U18.1@8768.54,3193.54
NetC62_2: C62.2 R50.1 U19.1 X26.1 | length 858.3
  Bottom Layer w30: X26.1 U19.1@11878.54,3153.54
NetC63_2: C63.2 R51.1 U19.3 X27.1 | length 1770.2
  Top Layer w30: X27.1 10728.54,3153.54 R51.1 10835,3260 11530,3260 11835,2955 U19.3
NetC64_2: C64.2 R52.1 U18.3 X28.1 | length 1181.6
  Top Layer w30: X28.1 8318.54,2618.54 R52.1 8400,2700 8400,2915 8480,2995 U18.3
NetC65_2: C65.2 R53.1 U19.2 X29.1 | length 1211.5
  Top Layer w30: R53.1@11468.54,2578.54 R53.1
  Bottom Layer w30: X29.1 11468.54,2578.54 R53.1 11580,2690 11580,2950 11685,3055 U19.2
NetC66_2: C66.2 R54.1 U19.4 X30.1 | length 1714.3
  Top Layer w30: X30.1 10728.54,2578.54 R54.1 10885,2735 11475,2735 11595,2855 U19.4
NetC67_2: C67.2 R55.1 U18.5 X31.1 | length 1407.3
  Top Layer w30: X31.1 8318.54,2043.54 R55.1 8545,2270 8545,2605 8735,2795 U18.5
NetC68_2: C68.2 R56.1 U19.13 X32.1 | length 2001.5
  Top Layer w30: R56.1@11468.54,2003.54 R56.1
  Bottom Layer w30: X32.1 11758.54,2003.54 11980,2225 11980,2915 12120,3055 U19.13
NetC69_2: C69.2 R57.1 U19.5 X33.1 | length 1911
  Top Layer w30: X33.1 10728.54,2003.54 R57.1 11210,2485 11540,2485 11810,2755 U19.5
NetD7_1: D7.1 R60.1 | length 163.7
  Top Layer w30: D7.1 6259.09,7659.09 R60.1
NetD8_1: D8.1 R61.1 | length 163.7
  Top Layer w30: D8.1 12424.09,1824.09 R61.1
NetQ1_1: Q1.1 R7.1 R9.1 | length 389.2
  Top Layer w30: R9.1 R7.1 Q1.1
NetQ2_1: Q2.1 R8.1 R10.1 | length 399.2
  Top Layer w30: Q2.1 R8.1 R10.1
NetQ3_1: Q3.1 R11.2 R13.1 | length 389.2
  Top Layer w30: R13.1 R11.2 Q3.1
NetQ4_1: Q4.1 R12.2 R14.1 | length 384.2
  Top Layer w30: Q4.1 11445,9395 R14.1@11445,9230
NetQ5_1: Q5.1 R15.1 R17.1 | length 429.2
  Top Layer w30: R17.1 R15.1 Q5.1
NetQ6_1: Q6.1 R16.1 R18.1 | length 424.2
  Top Layer w30: Q6.1 R16.1 R18.1
NetQ7_1: Q7.1 R19.2 R21.1 | length 399.2
  Top Layer w30: R21.1 R19.2 Q7.1
NetQ8_1: Q8.1 R20.2 R22.1 | length 399.2
  Top Layer w30: Q8.1 R20.2 R22.1
NetQ9_1: Q9.1 R23.1 R25.1 | length 469.2
  Top Layer w30: R25.1 R23.1 Q9.1
NetQ10_1: Q10.1 R24.1 R26.1 | length 481.3
  Top Layer w30: Q10.1 11460,5830 R24.1 R26.1
NetQ11_1: Q11.1 R27.2 R29.1 | length 449.2
  Top Layer w30: R27.2 R29.1 Q11.1
NetQ12_1: Q12.1 R28.2 R30.1 | length 474.2
  Top Layer w30: Q12.1 R30.1 R28.2
NetR7_2: R7.2 U5.7 | length 355
  Top Layer w30: U5.7 R7.2
NetR8_2: R8.2 U6.7 | length 350
  Top Layer w30: R8.2 U6.7
NetR13_2: R13.2 U5.5 | length 355
  Top Layer w30: U5.5 R13.2
NetR14_2: R14.2 U6.5 | length 350
  Top Layer w30: R14.2 U6.5
NetR15_2: R15.2 U7.7 | length 350
  Top Layer w30: U7.7 R15.2
NetR16_2: R16.2 U8.7 | length 350
  Top Layer w30: R16.2 U8.7
NetR21_2: R21.2 U7.5 | length 350
  Top Layer w30: U7.5 R21.2
NetR22_2: R22.2 U8.5 | length 350
  Top Layer w30: R22.2 U8.5
NetR23_2: R23.2 U9.7 | length 345
  Top Layer w30: U9.7 R23.2
NetR24_2: R24.2 U10.7 | length 350
  Top Layer w30: R24.2 U10.7
NetR29_2: R29.2 U9.5 | length 378.1
  Top Layer w30: U9.5 8915,5395 8995,5315 R29.2
NetR30_2: R30.2 U10.5 | length 412.1
  Top Layer w30: R30.2 12065,6185 U10.5
NetR31_2: R31.2 R35.1 U12.7 | length 405
  Top Layer w30: R35.1 R31.2 U12.7
NetR32_2: R32.2 R36.1 U13.7 | length 375
  Top Layer w30: R36.1 R32.2 U13.7
NetR33_1: R33.1 X14.1 | length 198.8
  Top Layer w30: R33.1 X14.1@3103.78,9090
NetR33_2: R33.2 U12.3 | length 125
  Top Layer w30: U12.3 R33.2
NetR34_1: R34.1 X15.1 | length 198.8
  Top Layer w30: R34.1 X15.1@5398.78,7910
NetR34_2: R34.2 U13.3 | length 125
  Top Layer w30: U13.3 R34.2
NetR37_2: R37.2 R41.1 U14.7 | length 375
  Top Layer w30: R41.1 R37.2 U14.7
NetR38_2: R38.2 R42.1 U15.7 | length 375
  Top Layer w30: R42.1 R38.2 U15.7
NetR39_1: R39.1 X17.1 | length 198.8
  Top Layer w30: R39.1 X17.1@3103.78,7915
NetR39_2: R39.2 U14.3 | length 125
  Top Layer w30: U14.3 R39.2
NetR40_1: R40.1 X18.1 | length 198.8
  Top Layer w30: R40.1 X18.1@5403.78,6710
NetR40_2: R40.2 U15.3 | length 125
  Top Layer w30: U15.3 R40.2
NetR43_2: R43.2 R45.1 U16.7 | length 375
  Top Layer w30: R45.1 R43.2 U16.7
NetR44_1: R44.1 X22.1 | length 198.8
  Top Layer w30: R44.1 X22.1@3113.78,6730
NetR44_2: R44.2 U16.3 | length 125
  Top Layer w30: U16.3 R44.2
NetR46_2: R46.2 R48.1 U17.7 | length 375
  Top Layer w30: R48.1 R46.2 U17.7
NetR47_1: R47.1 X24.1 | length 198.8
  Top Layer w30: R47.1 X24.1@5398.78,9085
NetR47_2: R47.2 U17.3 | length 125
  Top Layer w30: U17.3 R47.2
NetR58_1: R58.1 X34.2 | length 199.5
  Top Layer w30: X34.2 R58.1@9744.25,2459.25
NetR59_1: R59.1 X35.2 | length 199.5
  Top Layer w30: X35.2 R59.1@9744.25,2934.25
NetU1_4: U1.4 U2.5 | length 960.8
  Top Layer w30: U1.4 5614.76,2787.64 5714.76,2887.64 5714.76,3102.64 5809.76,3197.64 U2.5
NetU1_8: U1.8 U2.9 | length 1093.4
  Bottom Layer w30: U1.8 6104.76,2487.64 6314.76,2697.64 6314.76,2997.64 6414.76,3097.64 U2.9
NetU1_12: U1.12 U3.5 | length 1284
  Bottom Layer w30: U1.12 5709.76,2767.64 5709.76,2322.64 6154.76,1877.64 U3.5
NetU11_1: U11.1 X20.1 | length 541.1
  Top Layer w30: X20.1 2026.46,3071.46 2075,3120 2290,3120 2340,3070 U11.1
NetU11_3: U11.3 X23.1 | length 865.3
  Top Layer w30: X23.1 2065,2541.69 2065,2830 2105,2870 U11.3
NetU11_5: U11.5 X13.1 | length 1155.7
  Top Layer w30: X13.1 2060,1861.69 2060,2140 2245,2325 2245,2495 U11.5
NetU11_9: U11.9 X16.1 | length 970.4
  Top Layer w30: U11.9 2890,2570 2990,2470 2990,2348.78 X16.1
NetU11_11: U11.11 X19.1 | length 692.3
  Top Layer w30: U11.11 3170,2770 3271.46,2668.54 X19.1
NetU11_13: U11.13 X21.1 | length 845.1
  Top Layer w30: U11.13 2920,2970 2995,3045 2995,3110 3233.54,3348.54 X21.1
NetU18_8: U18.8 X34.1 | length 611.5
  Top Layer w30: U18.8 9070,2555 9303.54,2321.46 X34.1
NetU18_10: U18.10 X35.1 | length 473.3
  Top Layer w30: U18.10@9071.46,2796.46 X35.1
NetU19_6: U19.6 U19.10 | length 341.4
  Top Layer w30: U19.6 11955,2655 12055,2755 U19.10
NetU19_11: U19.11 U19.12 | length 300
  Top Layer w30: U19.11 12280,2855 12280,2955 U19.12
V5V: C3.2 C4.2 C7.2 C14.2 C16.2 C41.2 C42.2 C43.2 C46.2 C47.2 C48.2 C49.2 C52.2 C53.2 C54.2 C55.2 C57.2 C58.2 C60.2 C70.2 R1.2 R2.2 R3.2 R4.2 R5.2 R6.2 R31.1 R32.1 R37.1 R38.1 R43.1 R46.1 R49.2 R50.2 R51.2 R52.2 R53.2 R54.2 R55.2 R56.2 R57.2 R58.2 R59.2 R60.2 R61.2 U1.14 U2.14 U3.14 U4.14 U11.14 U12.4 U12.8 U13.4 U13.8 U14.4 U14.8 U15.4 U15.8 U16.4 U16.8 U17.4 U17.8 U18.14 U19.9 U19.14 U21.3 X2.1 X7.1 X8.1 X9.1 X13.3 X16.3 X19.3 X20.3 X21.3 X23.3 | length 5677.6
  Bottom Layer w100: X23.3 1745,2846.81 1745,3175.91 1916.14,3347.05 X20.3 ; C55.2 C53.2 2895,2620 C49.2 X19.3@3368.19,2395 ; C7.2 R49.2@8317.36,3597.64 ; R55.2 8465,2590 8465,3020 ; R52.2 8465,3020 ; R49.2 8465,3450 8465,3020 ; C60.2 9705,3295 R59.2
V15V: C2.2 C23.2 C24.2 C31.2 C32.2 C39.2 C40.2 D1.1 D2.1 D3.1 D4.1 D5.1 D6.1 U5.1 U6.1 U7.1 U8.1 U9.1 U10.1 U20.3 U21.1 | length 17446.5
  Top Layer w100: U21.1 6074.61,8765.39 6074.61,9010 C23.2@8350,9010 ; 6075,9010.39 C2.2 U20.3 ; C31.2 U7.1 8680,7305 ; C39.2 U9.1 8680,5695 ; D5.1 8680,5970 ; D3.1 8680,7555 ; D1.1 8355,9115.91 C23.2 U5.1 8600,9005 8680,8925 8680,7555 ; 12380,5455 D6.1 ; 12380,7280 U8.1 C32.2 ; 12380,8675 D2.1 ; 12385,5735 U10.1 C40.2 ; D4.1 12375,7025 ; C24.2 U6.1 12375,8800 12375,7025 ; 8680,5695 8680,5190 8970,4900 12225,4900 12375,5050 12375,7025 ; 8680,5695 8680,5970 ; 8680,5970 8680,7305 ; 8680,7305 8680,7555
V24V: C1.2 C5.1 C9.1 C12.1 C17.1 C18.2 C19.1 C20.2 C25.1 C26.2 C28.2 C34.2 C36.2 Q1.2 Q2.2 Q5.2 Q6.2 Q9.2 Q10.2 U20.1 X1.1
X_HOME: U18.2 X6.1 | length 3140.3
  Top Layer w30: X6.1 8686.46,4391.46 7695,3400 7695,3035 7785,2945 8025,2945 8175,3095 U18.2
Y_HOME_LEFT: U18.4 X6.2 | length 4420.7
  Top Layer w30: U18.4 8715,2895 8340,2520 8185,2520 7995,2330 7720,2330 7595,2455 7595,3500 8440,4345 8440,4590 8549.49,4699.49 8715,4699.49 X6.2
Y_HOME_RIGHT: U18.6 X6.3 | length 1974.8
  Top Layer w30: U18.6 8860,2785 8860,3815 8962.05,3917.05 X6.3
~MOTOR_1_PWM~: U4.2 U6.2 | length 7630.8
  Bottom Layer w30: U4.2 6990,6925 6990,7300 8140,8450 12615,8450 12775,8610 12775,8985 12735,9025 U6.2
~MOTOR_2_PWM~: U4.4 U8.2 | length 7767.6
  Bottom Layer w30: U4.4 7585,6950 7690,6950 7810,7070 7810,8000 8180,8370 12565,8370 12780,8155 12780,7425 12735,7380 U8.2
~MOTOR_3_PWM~: U4.6 U10.2 | length 8250.1
  Bottom Layer w30: U4.6 7885,7050 7885,7955 8205,8275 12010,8275 12325,7960 12325,6025 U10.2
~SD~: D8.2 U5.3 U6.3 U7.3 U8.3 U9.3 U10.3 U19.8 | length 19812.6
  Top Layer w30: U7.3 8185,7105 ; U5.3 8250,8805 8185,8740 8185,7105 ; U9.3 8185,5495 ; U19.8 12290,2555 ; D8.2 12290,2555 ; U8.3 12705,7480 12815,7370 12815,6010 12740,5935 U10.3 ; U6.3 12710,9125 12790,9045 12790,8810 12570,8590 12570,7485 ; 8185,5495 8185,7105 ; 8185,5495 8185,5155 8570,4770 12350,4770 12485,4635 12485,2710 12330,2555 12290,2555
  Bottom Layer w30: U19.8 12330,2555 12480,2705 12546.54,2705 12546.54,5521.54 12780,5755 12780,5885 12730,5935 U10.3
pads on no net: H1.0 H2.0 H3.0 H4.0 U2.2 U2.12 U3.2 U3.9 U3.11 U3.12 U3.13 U12.5 U13.5 U14.5 U15.5 U16.5 U17.5 X7.4 X8.4 X9.4

## Polygon pours and split planes (outlines as drawn)
V5V on Top Layer "Top-V5V" (solid, pour order 28): 1125,9875 12875,9875 12875,1125 1125,1125
V24V on Top Layer "Top-V24V" (solid, pour order 25): 7400,9456.01 6875,9456.01 6775,9357.42 6230,9357.42 6230,9875 11350,9875 11350,5019.65 11375,4995 9700,4995 9700,9308.13 9550,9456.01 7400,9456.01
GND on Bottom Layer "Bot-GND" (solid, pour order 26): 1125,9875 12875,9875 12875,1125 1125,1125
MOTOR_1_NEG on Bottom Layer "Bot-MOTOR_1_NEG" (solid, pour order 24): 11080,9440 11170,9440 11170,9315 11170,9220 11070,9120 11070,8985 11070,8940 10870,8940 10695,8940 10650,8985 10645,8990 10460,8990 10460,9140 10640,9320 11080,9320
MOTOR_1_POS on Bottom Layer "Bot-MOTOR_1_POS" (solid, pour order 23): 9860,8495 9950,8495 9950,8605 10025,8680 10235,8680 10455,8680 10625,8850 10625,8965 10475,8965 9960,8965 9960,8805 9860,8705 9860,8590
MOTOR_2_POS on Bottom Layer "Bot-MOTOR_2_POS" (solid, pour order 19): 9970,6810 9880,6810 9880,7030 9980,7130 9980,7155 9980,7280 10075,7280 10625,7280 10625,7155 10400,7155 10175,6930 9970,6930
MOTOR_3_POS on Bottom Layer "Bot-MOTOR_3_POS" (solid, pour order 17): 9975,5245 9885,5245 9885,5360 9885,5450 9985,5550 9985,5675 10050,5740 10670,5740 10670,5635 10665,5630 10510,5475 10155,5475 10095,5475 9975,5355
MOTOR_2_NEG on Bottom Layer "Bot-MOTOR_2_NEG" (solid, pour order 16): 11025,7795 11125,7795 11125,7575 11125,7550 11025,7450 11025,7300 10450,7300 10450,7425 10575,7550 10950,7550 11025,7625 11025,7795
MOTOR_3_NEG on Bottom Layer "Bot-MOTOR_3_NEG" (solid, pour order 14): 11160,6260 11070,6260 11070,6125 11045,6100 10895,6100 10780,6100 10530,5850 10530,5770 10730,5770 11060,5770 11060,5905 11160,6005 11160,6160

## Keep-outs
Keep-Out Layer:
  circle w300: c13000,5500 r150
  circle w300: c1000,5500 r150

## Text inside footprints (layer, text, board x,y; h text height)
C5: Top Overlay "+" at 9754.85,9624.01 h59.06 r180
C9: Top Overlay "+" at 11295.15,8160.99 h59.06
C12: Top Overlay "+" at 9774.85,8014.01 h59.06 r180
C17: Top Overlay "+" at 11245.15,6650.99 h59.06
C19: Top Overlay "+" at 9759.85,6394.01 h59.06 r180
C25: Top Overlay "+" at 11410.15,5055.99 h59.06
U1: Top Overlay "*" at 5517.26,3118.14 h50; Mechanical 13 "*" at 5547.26,3062.64 h50
U2: Top Overlay "*" at 6182.26,3628.14 h50; Mechanical 13 "*" at 6212.26,3572.64 h50
U3: Top Overlay "*" at 6182.26,2308.14 h50; Mechanical 13 "*" at 6212.26,2252.64 h50
U4: Top Overlay "*" at 7044.5,6727.5 h50 r90; Mechanical 13 "*" at 7100,6757.5 h50 r90
U5: Top Overlay "*" at 8512.5,9039.5 h50; Mechanical 13 "*" at 8563.28,8980 h50
U6: Top Overlay "*" at 12512.5,8890.5 h50 r180; Mechanical 13 "*" at 12461.72,8950 h50 r180
U7: Top Overlay "*" at 8512.5,7339.5 h50; Mechanical 13 "*" at 8563.28,7280 h50
U8: Top Overlay "*" at 12487.5,7245.5 h50 r180; Mechanical 13 "*" at 12436.72,7305 h50 r180
U9: Top Overlay "*" at 8522.5,5729.5 h50; Mechanical 13 "*" at 8573.28,5670 h50
U10: Top Overlay "*" at 12527.5,5700.5 h50 r180; Mechanical 13 "*" at 12476.72,5760 h50 r180
U11: Top Overlay "*" at 2407.5,3100.5 h50; Mechanical 13 "*" at 2437.5,3045 h50
U12: Top Overlay "*" at 2392.5,8855.5 h50 r180; Mechanical 13 "*" at 2341.72,8915 h50 r180
U13: Top Overlay "*" at 4687.5,7675.5 h50 r180; Mechanical 13 "*" at 4636.72,7735 h50 r180
U14: Top Overlay "*" at 2392.5,7680.5 h50 r180; Mechanical 13 "*" at 2341.72,7740 h50 r180
U15: Top Overlay "*" at 4692.5,6475.5 h50 r180; Mechanical 13 "*" at 4641.72,6535 h50 r180
U16: Top Overlay "*" at 2402.5,6495.5 h50 r180; Mechanical 13 "*" at 2351.72,6555 h50 r180
U17: Top Overlay "*" at 4687.5,8850.5 h50 r180; Mechanical 13 "*" at 4636.72,8910 h50 r180
U18: Top Overlay "*" at 8757.5,3225.5 h50; Mechanical 13 "*" at 8787.5,3170 h50
U19: Top Overlay "*" at 11867.5,3185.5 h50; Mechanical 13 "*" at 11897.5,3130 h50